# EAGLE board sensor_brd_2022 (EAGLE 9.6.2)
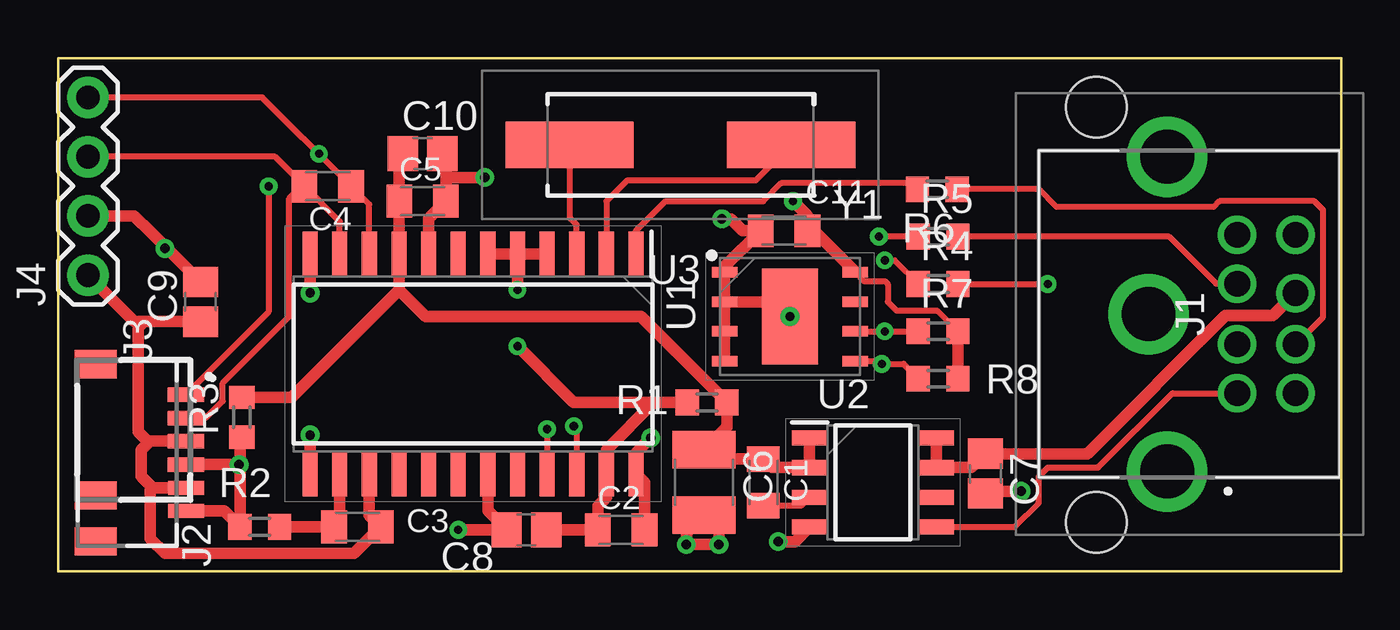
[diagram p0: board, top side]
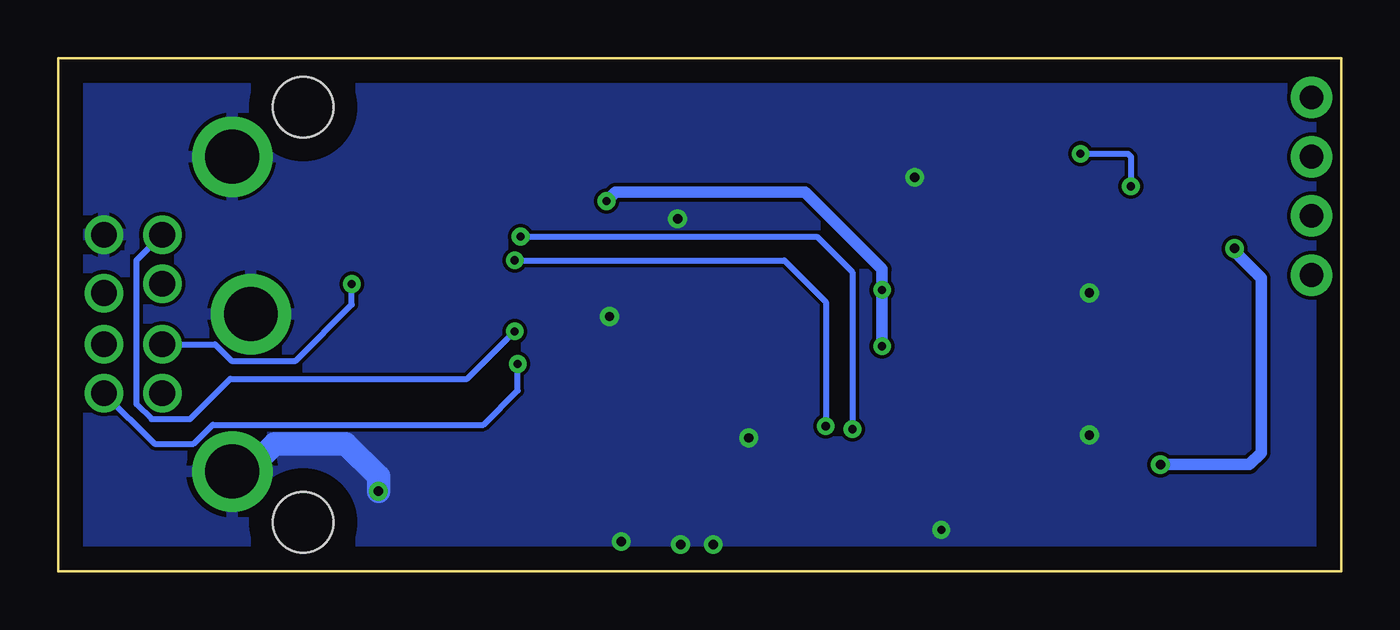
[diagram p1: board, bottom side, seen from below]

Size 55 x 22 mm. Coordinates in mm from the lower left corner, seen from the top.
Outline: 0,0 55,0 55,22 0,22 0,0
Copper layers (1*16): Top 0.035mm / dielectric 1.5mm / Bottom 0.035mm
Design rules "default": minimum track width 6mil, minimum drill 0.35mm, track to track 6mil, track to pad 6mil, pad to pad 6mil, via to via 6mil, smd to smd 6mil, copper to edge 40mil, drill to drill 6mil, minimum pad ring 10mil, minimum via ring 8mil, stop-mask expansion 4mil, vias tented up to drill 0mil, thermal gap 10mil
Holes 2.6 mm at 44.5,19.9 44.5,2.1

## Footprints (pad centres in the part's own frame; a part is rotated, then mirrored left to right if it is on the bottom)
C0805K = smd 1.1 x 1.4: 1 -1,0; 2 1,0
C1210 = smd 1.6 x 2.7: 1 -1.4,0; 2 1.4,0
C2012 = smd 1.3 x 1.5: 1 -0.85,0; 2 0.85,0
KMDGX8SBS = drill 1.1 pad 1.65: 1 0,0; 2 2.6,0; 3 -2.1,0; 4 0,-2.5; 5 4.7,0; 6 -2.1,-2.5; 7 2.2,-2.5; 8 4.7,-2.5 | drill 2.3 pad 3.45: MH1 -5.45,3; MH2 1.3,3.8; MH3 8.05,3
SM06B-SRSS-TB = smd 0.6 x 1.55: 1 -2.5,0.4; 2 -1.5,0.4; 3 -0.5,0.4; 4 0.5,0.4; 5 1.5,0.4; 6 2.5,0.4 | smd 1.2 x 1.8: 7 3.8,-3.475; 8 -3.8,-3.475
SM04B-SRSS-TB(LFSN) = smd 0.6 x 1.55: 1 1.5,4.661; 2 2.5,4.661; 3 3.5,4.661; 4 4.5,4.661 | smd 1.2 x 1.8: 5 0.2,0.786; 6 5.8,0.786
1X04-BIG = drill 1.016 pad 1.778: 1 0,0; 2 2.54,0; 3 5.08,0; 4 7.62,0
R0603 = smd 1 x 1.1: 1 -0.85,0; 2 0.85,0
SOIC127P1032X265-24N = smd 1.925 x 0.65: 1 -4.712,6.985; 2 -4.712,5.715; 3 -4.712,4.445; 4 -4.712,3.175; 5 -4.712,1.905; 6 -4.712,0.635; 7 -4.712,-0.635; 8 -4.712,-1.905; 9 -4.712,-3.175; 10 -4.712,-4.445; 11 -4.712,-5.715; 12 -4.712,-6.985; 13 4.712,-6.985; 14 4.712,-5.715; 15 4.712,-4.445; 16 4.712,-3.175; 17 4.712,-1.905; 18 4.712,-0.635; 19 4.712,0.635; 20 4.712,1.905; 21 4.712,3.175; 22 4.712,4.445; 23 4.712,5.715; 24 4.712,6.985
SOIC127P600X175-8N = smd 1.525 x 0.65: 1 -2.712,1.905; 2 -2.712,0.635; 3 -2.712,-0.635; 4 -2.712,-1.905; 5 2.712,-1.905; 6 2.712,-0.635; 7 2.712,0.635; 8 2.712,1.905
SON127P600X500X100-9N = smd 1.1 x 0.45: 1 -2.8,1.905; 2 -2.8,0.635; 3 -2.8,-0.635; 4 -2.8,-1.905; 5 2.8,-1.905; 6 2.8,-0.635; 7 2.8,0.635; 8 2.8,1.905 | smd 2.4 x 4.1: 9 0,0
9C4000MAAJT = smd 5.5 x 2: 1 -4.75,0; 2 4.75,0

## Placement (x,y rotation side)
C1  0.01uF  [C0805K]  30.23,3.81 270 top
C2  0.1uF  [C0805K]  24.13,1.78 0 top
C3  0.1uF  [C0805K]  12.83,1.91 180 top
C4  0.1uF  [C0805K]  11.56,16.51 180 top
C5  0.01uF  [C0805K]  15.62,15.88 0 top
C6  0.47uF  [C1210]  27.69,3.81 270 top
C7  10uF  [C2012]  39.75,4.19 270 top
C8  10uF  [C2012]  20.07,1.78 180 top
C9  10uF  [C2012]  6.1,11.56 90 top
C10  10uF  [C2012]  15.62,17.91 0 top
C11  0.01uF  [C0805K]  31.11,14.61 180 top
J1  KMDGX-8S-BS  [KMDGX8SBS]  50.55,9.73 90 top
J2  SM06B-SRSS-TB__LF__SN_  [SM06B-SRSS-TB]  5.08,5.08 270 top
J3  SM04B-SRSS-TB_LF__SN_  [SM04B-SRSS-TB(LFSN)]  0.81,9.06 270 top
J4  1X4-BIG  [1X04-BIG]  1.27,12.7 90 top
R1  10  [R0603]  27.81,7.24 180 top
R2  100  [R0603]  8.64,1.91 180 top
R3  1  [R0603]  7.87,6.6 90 top
R4  33  [R0603]  37.72,12.32 0 top
R5  33  [R0603]  37.72,14.35 0 top
R6  33  [R0603]  37.68,16.38 180 top
R7  4.7k  [R0603]  37.72,10.29 0 top
R8  4.7k  [R0603]  37.72,8.26 0 top
U1  AD7730BR  [SOIC127P1032X265-24N]  17.78,8.89 270 top
U2  ADP3301ARZ-5  [SOIC127P600X175-8N]  34.92,3.81 0 top
U3  24AA256-I_MF  [SON127P600X500X100-9N]  31.37,10.92 0 top
Y1  4.9152MHz  [9C4000MAAJT]  26.67,18.29 0 top

## Library data of the parts
C1-C11 J4 R1-R8 = adafruit
J1 = SamacSys_Parts; DESCRIPTION: Circular DIN Connectors 8P R/A FULL SHIELD GOLD PLATED; HEIGHT: 13.3mm; MANUFACTURER_NAME: Kycon; MANUFACTURER_PART_NUMBER: KMDGX-8S-BS; MOUSER_PART_NUMBER: 806-KMDGX-8S-BS; MOUSER_PRICE-STOCK: https://www.mouser.co.uk/ProductDetail/Kycon/KMDGX-8S-BS?qs=cuz0Kzc%2FkGBSI5WmI9vUiw%3D%3D
J2 = SamacSys_Parts; DESCRIPTION: connector,multipole PCB use,SM06B-SRSS-T JST SH Series, 1mm Pitch 6 Way 1 Row Right Angle PCB Header, Solder Termination, 1A; HEIGHT: mm; MANUFACTURER_NAME: JST (JAPAN SOLDERLESS TERMINALS); MANUFACTURER_PART_NUMBER: SM06B-SRSS-TB (LF)(SN)
J3 = SamacSys_Parts; DESCRIPTION: JST (JAPAN SOLDERLESS TERMINALS) - SM04B-SRSS-TB(LF)(SN) - CONNECTOR, HEADER, SMT, R/A, 1MM, 4WAY; HEIGHT: mm; MANUFACTURER_NAME: JST (JAPAN SOLDERLESS TERMINALS); MANUFACTURER_PART_NUMBER: SM04B-SRSS-TB(LF)(SN)
U1 = SamacSys_Parts; DESCRIPTION: Analog to Digital Converters - ADC CMOS 24-Bit Bridge Transducer; HEIGHT: 2.65mm; MANUFACTURER_NAME: Analog Devices; MANUFACTURER_PART_NUMBER: AD7730BR; MOUSER_PART_NUMBER: 584-AD7730BR; MOUSER_PRICE-STOCK: https://www.mouser.com/Search/Refine.aspx?Keyword=584-AD7730BR
U2 = SamacSys_Parts; DESCRIPTION: LDO Regulator 5V 0.2A 8-Pin SOIC; HEIGHT: 1.75mm; MANUFACTURER_NAME: Analog Devices; MANUFACTURER_PART_NUMBER: ADP3301ARZ-5; MOUSER_PART_NUMBER: 584-ADP3301ARZ-5
U3 = SamacSys_Parts; DESCRIPTION: 256K 32Kx8 1.8V Ser. EEPROM,24AA256-I/MF; HEIGHT: 1mm; MANUFACTURER_NAME: Microchip; MANUFACTURER_PART_NUMBER: 24LC256-I/MF; MOUSER_PART_NUMBER: 579-24AA256-I/MF; MOUSER_PRICE-STOCK: https://www.mouser.co.uk/ProductDetail/Microchip-Technology/24AA256-I-MF?qs=Sez7gRs8XSWcP7qgmBnMNQ%3D%3D
Y1 = SamacSys_Parts; DESCRIPTION: Crystals CRYSTAL 4.9152MHZ 20PF SMD,CSM-7X-DN,+/-100ppm,+/-30ppm,20pF,150 Ohm,Fundamental,-40 C 85 C,HC49/US,0.449" L x 0.189" W (11.40mm x 4.80mm),0.169" (4.30mm); FREQ: 4.9152MHZ; HEIGHT: 4.3mm; MANUFACTURER_NAME: ECS; MANUFACTURER_PART_NUMBER: ECS-049-20-5PXDN-TR; MOUSER_PART_NUMBER: 520-049-20-5PXDN-TR; MOUSER_PRICE-STOCK: https://www.mouser.com/ProductDetail/ECS/ECS-049-20-5PXDN-TR?qs=u8ePFVghNnQG%2FqmG9wvQ8w%3D%3D

## Nets
+5V: C2.1 C8.1 C11.1 R1.2 R7.2 R8.2 U1.4 U1.5 U1.6 U1.23 U3.8
+5V/1: C1.1 C5.1 C6.1 C10.1 R1.1 R3.2 U1.9 U2.1 U2.2
AGND: C5.2 C6.2 C10.2 U1.8 U1.12 U1.13
DGND: C2.2 C7.2 C8.2 C11.2 J1.8 J1.MH1 J1.MH2 J1.MH3 U1.19 U1.24 U2.4 U3.1 U3.2 U3.3 U3.4 U3.9
DIN: J1.1 R4.2
DOUT: J1.2 R5.2
E+: C9.2 J2.4 J2.6 J3.4 J4.2 R2.2 R3.1
E-: C3.1 C9.1 J2.3 J2.5 J3.3 J4.1 U1.15
EN: J1.3 U2.5
N$1: C1.2 U2.3
N$2: U1.2 Y1.2
N$3: U1.3 Y1.1
N$4: R4.1 U1.22
N$5: C3.2 R2.1 U1.14
N$6: R6.2 U1.1
N$8: R5.1 U1.21
S+: C4.1 J2.1 J3.1 J4.4 U1.10
S-: C4.2 J2.2 J3.2 J4.3 U1.11
SCL: J1.5 R7.1 U3.6
SCLK: J1.4 R6.1
SDA: J1.6 R8.1 U3.5
V+: C7.1 J1.7 U2.7 U2.8

## Tracks (layer width: path | path; a pad name or v marks a point on that pad's centre or on a via)
+5V  (via drill 0.35)
  Top 0.25: U3.8 34.55,12.45 35.43,12.45 35.56,12.32 35.56,11.56 35.94,11.18 37.68,11.18 R7.2
  Top 0.5: U1.6 U1.4 U1.5 v19.68,12.06 | C8.1 C2.1 23.13,2.81 23.5,3.17 U1.23 23.5,5.21 25.53,7.24 R1.2 22.1,7.24 v19.68,9.65 | R7.2 R8.2 | U3.8 32.39,14.61 C11.1 32.12,15.26 v31.5,15.88
  Bottom 0.5: v19.68,9.65 v19.68,12.06 19.68,12.95 22.99,16.26 31.11,16.26 v31.5,15.88 31.62,15.88
+5V/1
  Top 0.5: U2.1 U2.2 30.59,4.45 C1.1 28.09,4.81 C6.1 28.66,6.19 R1.1 24.98,10.92 15.75,10.92 14.61,12.06 | C10.1 14.62,17.76 C5.1 14.61,15.86 U1.9 14.61,12.06 | R3.2 9.99,7.45 14.61,12.06
AGND  (via drill 0.4)
  Top 0.5: U1.8 15.88,15.13 C5.2 16.62,16.89 | C10.2 16.62,17.76 16.62,16.89 | 26.92,1.27 26.92,1.65 C6.2 28.32,1.77 v28.32,1.14 v26.92,1.14 | U1.12 v10.79,11.94 10.79,11.81 | U1.13 v10.79,5.84 10.79,5.97 | 16.62,16.89 v18.29,16.89
  pour Bottom: 54.74,21.59 54.74,0.25 54.61,0.38 0.38,0.38 0.38,21.59
  pour Bottom: 9.53,13.21 11.94,13.21 12.19,12.95 12.19,5.33 11.81,4.95 9.53,4.95 9.4,5.08 9.4,13.08
  pour Bottom: 25.78,1.14 26.04,0.89 29.59,0.89 29.84,1.14 29.84,1.91 29.21,2.54 25.91,2.54 25.78,2.41
DGND  (via drill 0.35, 0.4)
  Top 0.5: U3.2 U3.1 28.57,13.06 C11.2 29.34,14.61 28.83,15.11 v28.45,15.11 | U3.2 U3.3 U3.4 | U3.2 30.61,11.56 | U1.19 18.41,2.58 C8.2 v17.14,1.78 17.02,1.78 | C7.2 39.84,3.43 v41.27,3.43 | U2.4 31.58,1.27 v30.86,1.27 30.73,1.27 | C2.2 25.13,3.81 U1.24 24.77,5.08 v25.4,5.71
  Bottom 1: J1.MH1 46.9,4.28 45.72,5.46 42.67,5.46 41.27,4.06 v41.27,3.43
  other vias: 31.37,10.92
  pour Bottom: 0.25,21.59 54.74,21.59 54.86,21.72 54.86,0.38 54.48,0 0.38,0 0.25,0.13 0.25,21.46
DIN  (via drill 0.35)
  Top 0.254: R4.2 v42.42,12.32
  Bottom 0.254: J1.1 48.28,9.73 47.58,9.03 44.82,9.03 42.42,11.43 v42.42,12.32
DOUT
  Top 0.254: J1.2 49.65,12.33 47.62,14.35 R5.2
E+  (via drill 0.4)
  Top 0.25: 5.95,12.55 4.66,13.84 v4.57,13.84 | v4.57,13.84 3.98,14.43 3.98,14.52 | R3.1 7.87,5.46 | 7.87,5.46 7.87,4.79 7.79,4.7 | 7.79,4.45 7.79,4.53 v7.75,4.57 7.75,5.33 7.87,5.46 | v4.57,13.84 3.17,15.24 J4.2
  Top 0.5: 7.79,5.84 R3.1 | 7.79,4.7 7.79,4.45 R2.2 7.11,2.58 J2.6 | 7.79,4.7 7.79,5.84 | 7.79,5.84 7.7,5.92 | 7.79,4.7 7.67,4.58 J2.4 J3.4 | J4.2 3.26,15.24 3.98,14.52 5.95,12.55 C9.2
  Bottom 0.25: v4.57,13.84 4.7,13.84
  Bottom 0.5: v7.75,4.57 3.94,4.57 3.43,5.08 3.43,12.57 4.7,13.84
E-
  Top 0.5: 6.18,10.71 C9.1 3.68,10.71 | 3.93,5.58 J2.3 J3.3 | 3.93,5.58 3.56,5.21 3.56,4.06 4.04,3.58 | 4.04,3.58 J2.5 | U1.15 13.34,2.4 C3.1 12.68,0.76 4.57,0.76 3.94,1.4 3.94,3.48 4.04,3.58 | 3.93,5.58 3.82,5.58 3.43,5.97 3.43,10.45 3.68,10.71 | 3.68,10.71 3.26,10.71 J4.1
EN
  Top 0.25: J1.3 47.76,7.63 44.58,4.45 42.42,4.45 42.04,4.06 42.04,2.92 41.02,1.91 U2.5 37.51,1.78 37.21,1.78
  Top 0.254: 37.21,1.78 37.08,1.91
N$1
  Top 0.254: U2.3 31.85,2.81 C1.2
N$2
  Top 0.254: Y1.2 29.9,16.76 24.38,16.76 23.5,15.88 U1.2
N$3
  Top 0.254: Y1.1 21.92,15.16 22.23,14.86 22.23,14.22
  Top 0.5: U1.3 22.23,14.22
N$4  (via drill 0.35)
  Top 0.25: v35.43,13.34 35.85,13.34
  Top 0.254: 35.85,13.34 R4.1 | v22.1,6.22 22.23,6.1 U1.22
  Bottom 0.254: v35.43,13.34 23.88,13.34 22.1,11.56 v22.1,6.22
N$5
  Top 0.5: U1.14 12.06,2.14 C3.2 R2.1
N$6
  Top 0.254: R6.2 36.58,16.64 30.99,16.64 30.23,15.88 26.04,15.88 24.77,14.61 U1.1
N$8  (via drill 0.35)
  Top 0.254: R5.1 v35.18,14.35 | v20.95,6.1 U1.21
  Bottom 0.254: v35.18,14.35 22.48,14.35 20.95,12.83 v20.95,6.1
S+  (via drill 0.35)
  Top 0.25: J2.1 9.02,11.12 v9.02,16.51 | v11.18,17.91 11.18,17.89 12.25,16.82
  Top 0.254: U1.10 13.34,15.73 C4.1 12.25,16.82 8.75,20.32 J4.4
  Top 0.5: J3.1 J2.1
  Bottom 0.25: v11.18,17.91 9.14,17.91 9.02,17.78 v9.02,16.51
S-
  Top 0.25: J2.2 | C4.2 10.41,16.51 9.91,16 9.91,10.93 7.05,8.07 7.05,7.3 6.33,6.58 5.59,6.58 J2.2 | J3.2 J2.2
  Top 0.254: U1.11 12.06,15 C4.2 9.29,17.78 J4.3
SCL  (via drill 0.35)
  Top 0.254: U3.6 v35.43,10.29 R7.1
  Bottom 0.254: J1.5 51.65,13.33 51.65,7.17 51,6.53 49.35,6.53 47.62,8.26 37.47,8.26 v35.43,10.29
SCLK
  Top 0.254: J1.4 54.23,10.91 54.23,15.49 53.85,15.88 49.78,15.88 49.53,15.62 42.8,15.62 42.04,16.38 R6.1
SDA  (via drill 0.35)
  Top 0.254: U3.5 35.18,9.02 v35.31,8.89 36.23,8.89 R8.1
  Bottom 0.254: J1.6 50.88,5.46 49.2,5.46 48.38,6.28 36.77,6.28 35.31,7.75 v35.31,8.89
V+
  Top 0.5: J1.7 52.07,10.96 50.04,10.96 44.12,5.04 C7.1 39.16,4.45 U2.7 U2.8